# EAGLE board ME433_proto_board (EAGLE 5.11)
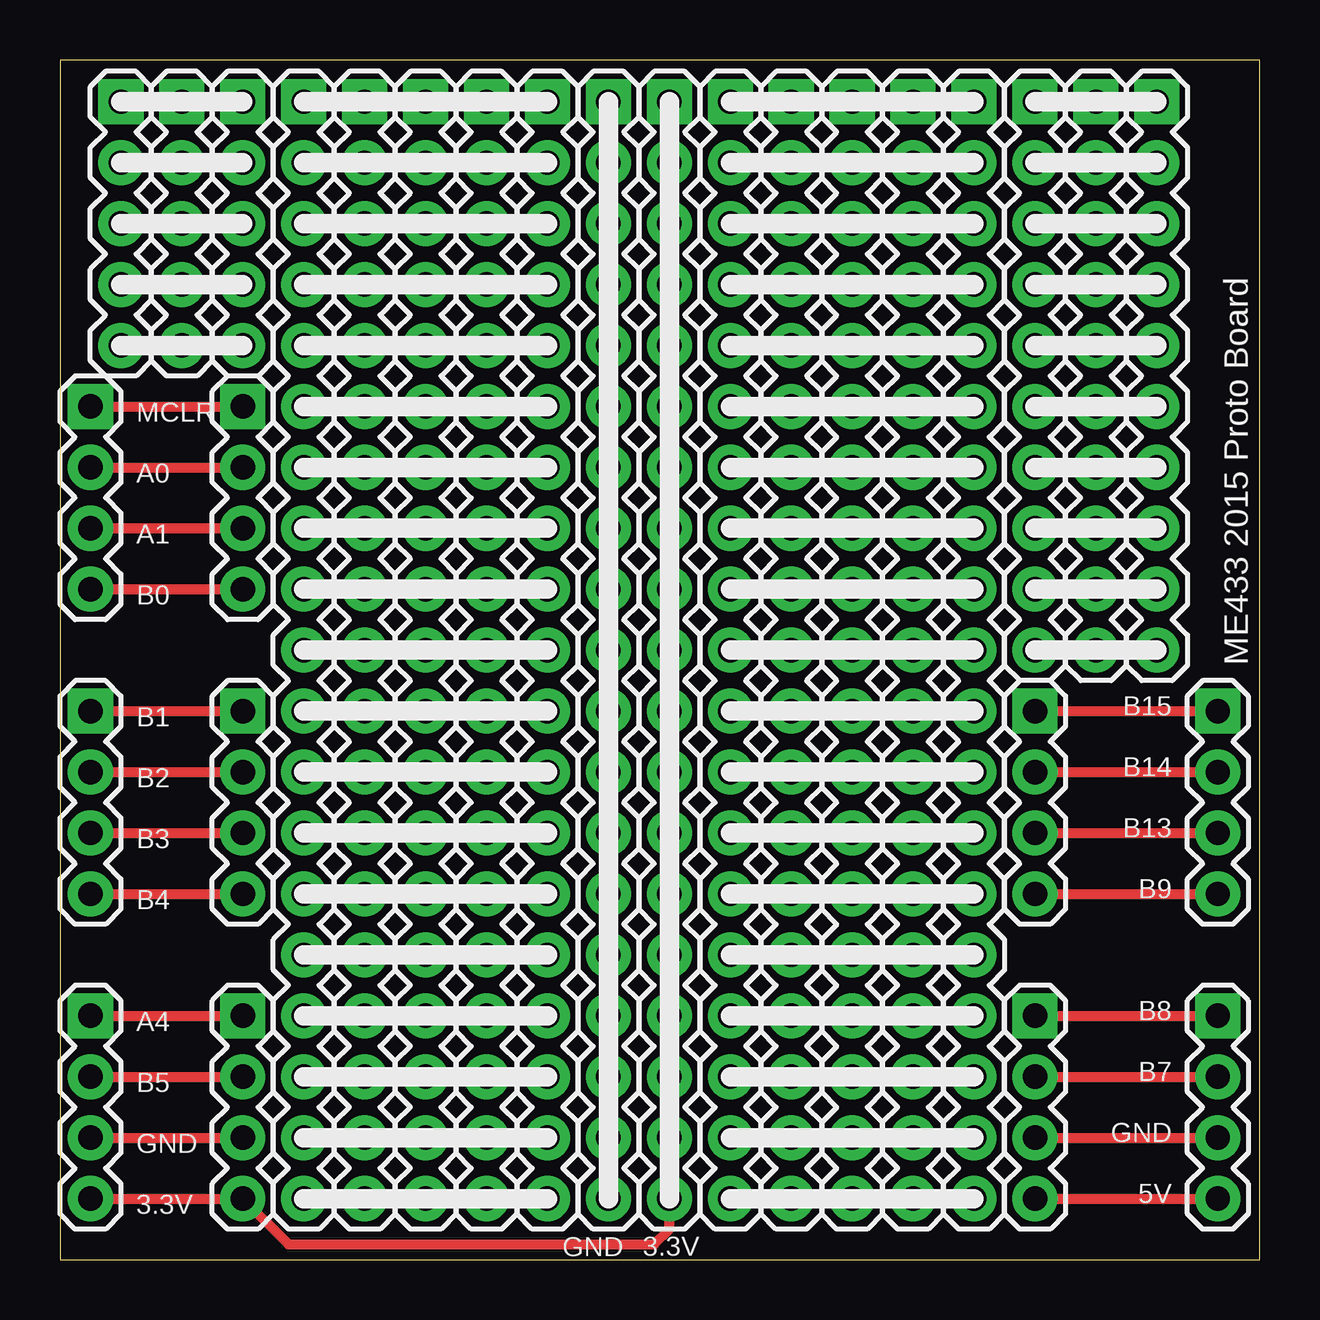
[diagram p0: board, top side]
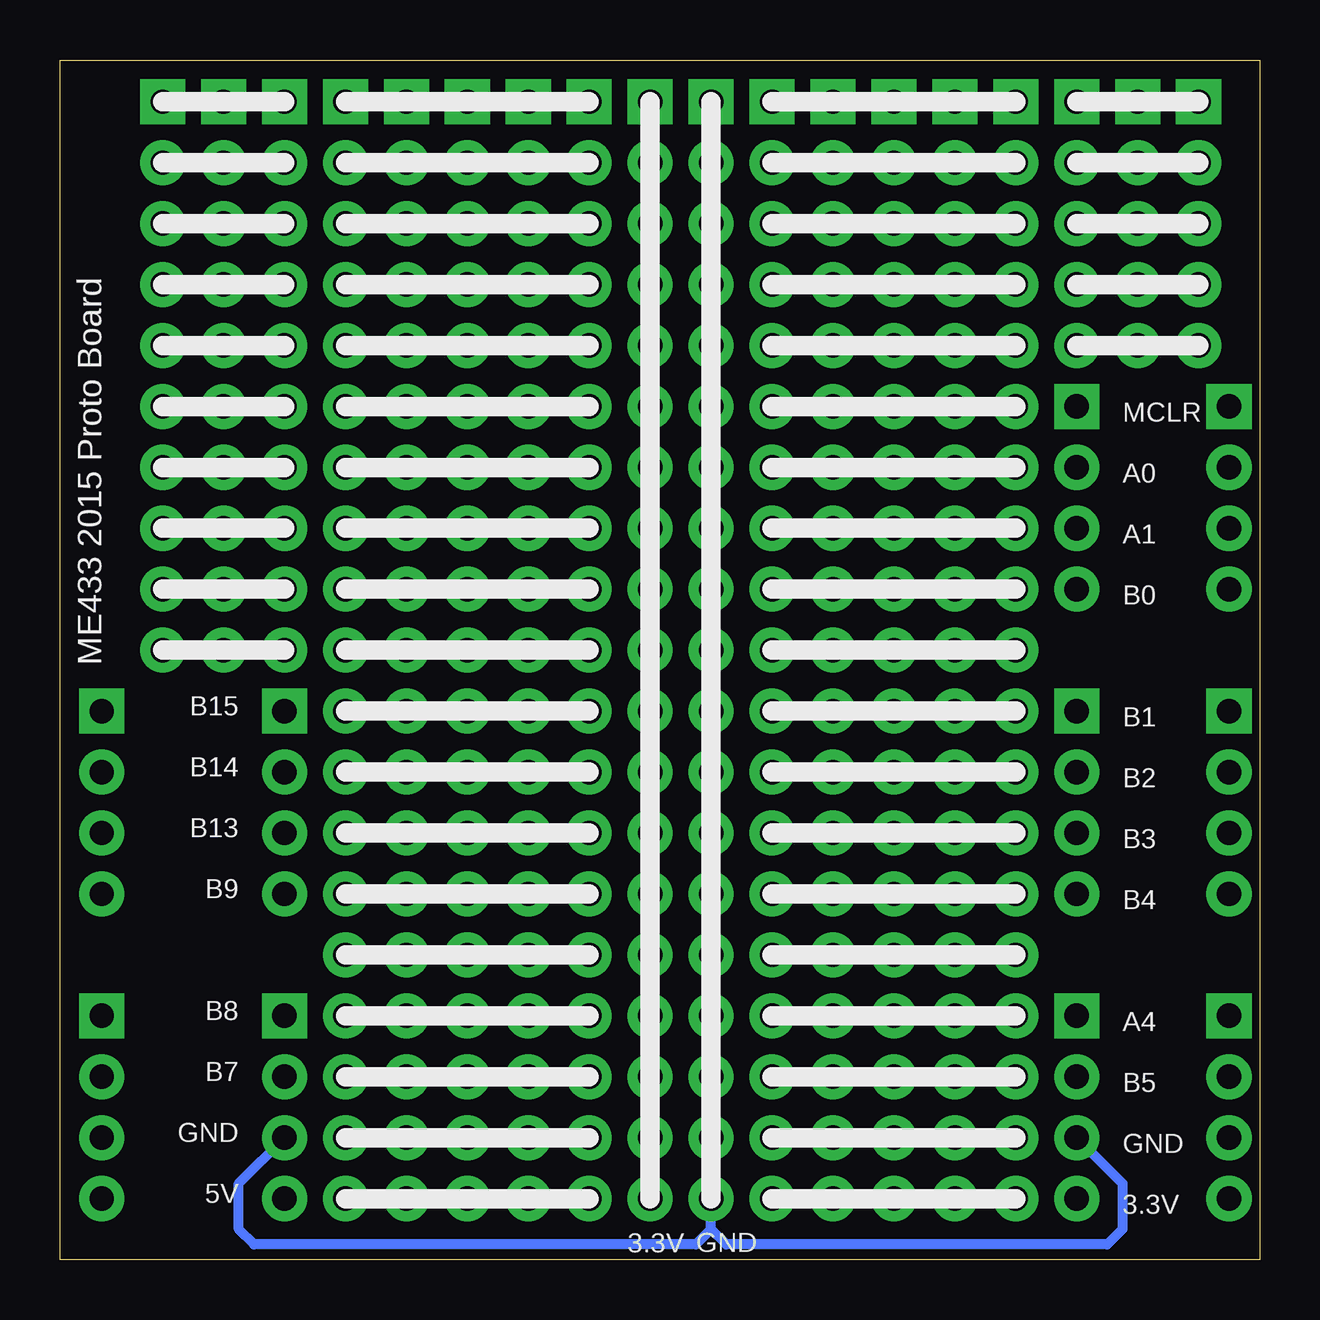
[diagram p1: board, bottom side, seen from below]

Size 50 x 50 mm. Coordinates in mm from the lower left corner, seen from the top.
Outline: 0,0 50,0 50,50 0,50 0,0
Copper layers (1*16): Top 0.035mm / dielectric 1.5mm / Bottom 0.035mm
Design rules "default": minimum track width 10mil, minimum drill 24mil, track to track 8mil, track to pad 8mil, pad to pad 8mil, via to via 8mil, smd to smd 8mil, copper to edge 40mil, drill to drill 8mil, minimum pad ring 10mil, minimum via ring 8mil, stop-mask expansion 4mil, vias tented up to drill 0mil, thermal gap 10mil

## Footprints (pad centres in the part's own frame; a part is rotated, then mirrored left to right if it is on the bottom)
1X04 = drill 1.016 pad 1.88 square: 1 0,0 | drill 1.016 pad 1.88 round: 2 2.54,0; 3 5.08,0; 4 7.62,0
1X19 = drill 1.016 pad 1.88 square: 1 0,0 | drill 1.016 pad 1.88 round: 2 2.54,0; 3 5.08,0; 4 7.62,0; 5 10.16,0; 6 12.7,0; 7 15.24,0; 8 17.78,0; 9 20.32,0; 10 22.86,0; 11 25.4,0; 12 27.94,0; 13 30.48,0; 14 33.02,0; 15 35.56,0; 16 38.1,0; 17 40.64,0; 18 43.18,0; 19 45.72,0
1X10 = drill 1.016 pad 1.88 square: 1 0,0 | drill 1.016 pad 1.88 round: 2 2.54,0; 3 5.08,0; 4 7.62,0; 5 10.16,0; 6 12.7,0; 7 15.24,0; 8 17.78,0; 9 20.32,0; 10 22.86,0
1X05 = drill 1.016 pad 1.88 square: 1 0,0 | drill 1.016 pad 1.88 round: 2 2.54,0; 3 5.08,0; 4 7.62,0; 5 10.16,0

## Placement (x,y rotation side)
U$1  1X04_HEADER  [1X04]  1.27,35.56 270 top
U$2  1X04_HEADER  [1X04]  1.27,22.86 270 top
U$3  1X04_HEADER  [1X04]  48.26,22.86 270 top
U$4  1X04_HEADER  [1X04]  48.26,10.16 270 top
U$5  1X04_HEADER  [1X04]  1.27,10.16 270 top
U$6  1X19_HEADER  [1X19]  10.16,48.26 270 top
U$7  1X19_HEADER  [1X19]  12.7,48.26 270 top
U$8  1X19_HEADER  [1X19]  15.24,48.26 270 top
U$9  1X19_HEADER  [1X19]  17.78,48.26 270 top
U$10  1X19_HEADER  [1X19]  20.32,48.26 270 top
U$11  1X19_HEADER  [1X19]  27.94,48.26 270 top
U$12  1X19_HEADER  [1X19]  30.48,48.26 270 top
U$13  1X19_HEADER  [1X19]  33.02,48.26 270 top
U$14  1X19_HEADER  [1X19]  38.1,48.26 270 top
U$15  1X19_HEADER  [1X19]  35.56,48.26 270 top
U$16  1X19_HEADER  [1X19]  22.86,48.26 270 top
U$17  1X19_HEADER  [1X19]  25.4,48.26 270 top
U$18  1X04_HEADER  [1X04]  7.62,35.56 270 top
U$19  1X04_HEADER  [1X04]  7.62,22.86 270 top
U$20  1X04_HEADER  [1X04]  7.62,10.16 270 top
U$21  1X04_HEADER  [1X04]  40.64,22.86 270 top
U$22  1X04_HEADER  [1X04]  40.64,10.16 270 top
U$23  1X10_HEADER  [1X10]  40.64,48.26 270 top
U$24  1X10_HEADER  [1X10]  43.18,48.26 270 top
U$25  1X10_HEADER  [1X10]  45.72,48.26 270 top
U$26  1X05_HEADER  [1X05]  7.62,48.26 270 top
U$27  1X05_HEADER  [1X05]  5.08,48.26 270 top
U$28  1X05_HEADER  [1X05]  2.54,48.26 270 top

## Library data of the parts
U$1-U$28 = ME433

## Nets
3.3V: U$5.4 U$17.1 U$17.2 U$17.3 U$17.4 U$17.5 U$17.6 U$17.7 U$17.8 U$17.9 U$17.10 U$17.11 U$17.12 U$17.13 U$17.14 U$17.15 U$17.16 U$17.17 U$17.18 U$17.19 U$20.4
5V: U$4.4 U$22.4
A0: U$1.2 U$18.2
A1: U$1.3 U$18.3
A4: U$5.1 U$20.1
B0: U$1.4 U$18.4
B1: U$2.1 U$19.1
B2: U$2.2 U$19.2
B3: U$2.3 U$19.3
B4: U$2.4 U$19.4
B5: U$5.2 U$20.2
B7: U$4.2 U$22.2
B8: U$4.1 U$22.1
B9: U$3.4 U$21.4
B13: U$3.3 U$21.3
B14: U$3.2 U$21.2
B15: U$3.1 U$21.1
GND: U$4.3 U$5.3 U$16.1 U$16.2 U$16.3 U$16.4 U$16.5 U$16.6 U$16.7 U$16.8 U$16.9 U$16.10 U$16.11 U$16.12 U$16.13 U$16.14 U$16.15 U$16.16 U$16.17 U$16.18 U$16.19 U$20.3 U$22.3
MCLR: U$1.1 U$18.1
N$1: U$6.1 U$7.1 U$8.1 U$9.1 U$10.1
N$2: U$6.2 U$7.2 U$8.2 U$9.2 U$10.2
N$3: U$6.3 U$7.3 U$8.3 U$9.3 U$10.3
N$4: U$6.4 U$7.4 U$8.4 U$9.4 U$10.4
N$5: U$6.5 U$7.5 U$8.5 U$9.5 U$10.5
N$6: U$6.6 U$7.6 U$8.6 U$9.6 U$10.6
N$7: U$6.7 U$7.7 U$8.7 U$9.7 U$10.7
N$8: U$6.8 U$7.8 U$8.8 U$9.8 U$10.8
N$9: U$6.9 U$7.9 U$8.9 U$9.9 U$10.9
N$10: U$6.10 U$7.10 U$8.10 U$9.10 U$10.10
N$11: U$6.11 U$7.11 U$8.11 U$9.11 U$10.11
N$12: U$6.12 U$7.12 U$8.12 U$9.12 U$10.12
N$13: U$6.13 U$7.13 U$8.13 U$9.13 U$10.13
N$14: U$6.14 U$7.14 U$8.14 U$9.14 U$10.14
N$15: U$6.15 U$7.15 U$8.15 U$9.15 U$10.15
N$16: U$6.16 U$7.16 U$8.16 U$9.16 U$10.16
N$17: U$6.17 U$7.17 U$8.17 U$9.17 U$10.17
N$18: U$6.18 U$7.18 U$8.18 U$9.18 U$10.18
N$19: U$6.19 U$7.19 U$8.19 U$9.19 U$10.19
N$20: U$11.1 U$12.1 U$13.1 U$14.1 U$15.1
N$21: U$11.2 U$12.2 U$13.2 U$14.2 U$15.2
N$22: U$11.3 U$12.3 U$13.3 U$14.3 U$15.3
N$23: U$11.4 U$12.4 U$13.4 U$14.4 U$15.4
N$24: U$11.5 U$12.5 U$13.5 U$14.5 U$15.5
N$25: U$11.6 U$12.6 U$13.6 U$14.6 U$15.6
N$26: U$11.7 U$12.7 U$13.7 U$14.7 U$15.7
N$27: U$11.8 U$12.8 U$13.8 U$14.8 U$15.8
N$28: U$11.9 U$12.9 U$13.9 U$14.9 U$15.9
N$29: U$11.10 U$12.10 U$13.10 U$14.10 U$15.10
N$30: U$11.11 U$12.11 U$13.11 U$14.11 U$15.11
N$31: U$11.12 U$12.12 U$13.12 U$14.12 U$15.12
N$32: U$11.13 U$12.13 U$13.13 U$14.13 U$15.13
N$33: U$11.14 U$12.14 U$13.14 U$14.14 U$15.14
N$34: U$11.15 U$12.15 U$13.15 U$14.15 U$15.15
N$35: U$11.16 U$12.16 U$13.16 U$14.16 U$15.16
N$36: U$11.17 U$12.17 U$13.17 U$14.17 U$15.17
N$37: U$11.18 U$12.18 U$13.18 U$14.18 U$15.18
N$38: U$11.19 U$12.19 U$13.19 U$14.19 U$15.19
N$41: U$23.1 U$24.1 U$25.1
N$42: U$23.2 U$24.2 U$25.2
N$43: U$23.3 U$24.3 U$25.3
N$44: U$23.4 U$24.4 U$25.4
N$45: U$23.5 U$24.5 U$25.5
N$46: U$23.6 U$24.6 U$25.6
N$47: U$23.7 U$24.7 U$25.7
N$48: U$23.8 U$24.8 U$25.8
N$49: U$23.9 U$24.9 U$25.9
N$50: U$23.10 U$24.10 U$25.10
N$51: U$26.1 U$27.1 U$28.1
N$52: U$26.2 U$27.2 U$28.2
N$53: U$26.3 U$27.3 U$28.3
N$54: U$26.4 U$27.4 U$28.4
N$55: U$26.5 U$27.5 U$28.5

## Tracks (layer width: path | path; a pad name or v marks a point on that pad's centre or on a via)
3.3V
  Top 0.406: U$5.4 U$20.4 9.53,0.64 24.77,0.64 25.4,1.27 U$17.19 U$17.18 U$17.17 U$17.16 U$17.15 U$17.14 U$17.13 U$17.12 U$17.11 U$17.10 U$17.9 U$17.8 U$17.7 U$17.6 U$17.5 U$17.4 U$17.3 U$17.2 U$17.1
5V
  Top 0.406: U$22.4 U$4.4
A0
  Top 0.406: U$1.2 U$18.2
A1
  Top 0.406: U$1.3 U$18.3
A4
  Top 0.406: U$5.1 U$20.1
B0
  Top 0.406: U$1.4 U$18.4
B1
  Top 0.406: U$2.1 U$19.1
B2
  Top 0.406: U$2.2 U$19.2
B3
  Top 0.406: U$2.3 U$19.3
B4
  Top 0.406: U$2.4 U$19.4
B5
  Top 0.406: U$5.2 U$20.2
B7
  Top 0.406: U$22.2 U$4.2
B8
  Top 0.406: U$22.1 U$4.1
B9
  Top 0.406: U$21.4 U$3.4
B13
  Top 0.406: U$21.3 U$3.3
B14
  Top 0.406: U$21.2 U$3.2
B15
  Top 0.406: U$21.1 U$3.1
GND
  Top 0.406: U$5.3 U$20.3 | U$22.3 U$4.3 | U$16.19 U$16.18 U$16.17 U$16.16 U$16.15 U$16.14 U$16.13 U$16.12 U$16.11 U$16.10 U$16.9 U$16.8 U$16.7 U$16.6 U$16.5 U$16.4 U$16.3 U$16.2 U$16.1
  Bottom 0.406: U$20.3 5.71,3.17 5.71,1.27 6.35,0.64 22.23,0.64 22.86,1.27 | 22.86,1.27 U$16.19 | U$22.3 42.55,3.17 42.55,1.27 41.91,0.64 23.5,0.64 22.86,1.27
MCLR
  Top 0.406: U$1.1 U$18.1
N$1
  Top 0.406: U$6.1 U$7.1 U$8.1 U$9.1 U$10.1
N$2
  Top 0.406: U$6.2 U$7.2 U$8.2 U$9.2 U$10.2
N$3
  Top 0.406: U$10.3 U$9.3 U$8.3 U$7.3 U$6.3
N$4
  Top 0.406: U$6.4 U$7.4 U$8.4 U$9.4 U$10.4
N$5
  Top 0.406: U$10.5 U$9.5 U$8.5 U$7.5 U$6.5
N$6
  Top 0.406: U$6.6 U$7.6 U$8.6 U$9.6 U$10.6
N$7
  Top 0.406: U$10.7 U$9.7 U$8.7 U$7.7 U$6.7
N$8
  Top 0.406: U$6.8 U$7.8 U$8.8 U$9.8 U$10.8
N$9
  Top 0.406: U$10.9 U$9.9 U$8.9 U$7.9 U$6.9
N$10
  Top 0.406: U$6.10 U$7.10 U$8.10 U$9.10 U$10.10
N$11
  Top 0.406: U$10.11 U$9.11 U$8.11 U$7.11 U$6.11
N$12
  Top 0.406: U$6.12 U$7.12 U$8.12 U$9.12 U$10.12
N$13
  Top 0.406: U$10.13 U$9.13 U$8.13 U$7.13 U$6.13
N$14
  Top 0.406: U$6.14 U$7.14 U$8.14 U$9.14 U$10.14
N$15
  Top 0.406: U$10.15 U$9.15 U$8.15 U$7.15 U$6.15
N$16
  Top 0.406: U$6.16 U$7.16 U$8.16 U$9.16 U$10.16
N$17
  Top 0.406: U$10.17 U$9.17 U$8.17 U$7.17 U$6.17
N$18
  Top 0.406: U$6.18 U$7.18 U$8.18 U$9.18 U$10.18
N$19
  Top 0.406: U$10.19 U$9.19 U$8.19 U$7.19 U$6.19
N$20
  Top 0.406: U$11.1 U$12.1 U$13.1 U$15.1 U$14.1
N$21
  Top 0.406: U$14.2 U$15.2 U$13.2 U$12.2 U$11.2
N$22
  Top 0.406: U$11.3 U$12.3 U$13.3 U$15.3 U$14.3
N$23
  Top 0.406: U$14.4 U$15.4 U$13.4 U$12.4 U$11.4
N$24
  Top 0.406: U$11.5 U$12.5 U$13.5 U$15.5 U$14.5
N$25
  Top 0.406: U$14.6 U$15.6 U$13.6 U$12.6 U$11.6
N$26
  Top 0.406: U$11.7 U$12.7 U$13.7 U$15.7 U$14.7
N$27
  Top 0.406: U$14.8 U$15.8 U$13.8 U$12.8 U$11.8
N$28
  Top 0.406: U$11.9 U$12.9 U$13.9 U$15.9 U$14.9
N$29
  Top 0.406: U$14.10 U$15.10 U$13.10 U$12.10 U$11.10
N$30
  Top 0.406: U$11.11 U$12.11 U$13.11 U$15.11 U$14.11
N$31
  Top 0.406: U$14.12 U$15.12 U$13.12 U$12.12 U$11.12
N$32
  Top 0.406: U$11.13 U$12.13 U$13.13 U$15.13 U$14.13
N$33
  Top 0.406: U$14.14 U$15.14 U$13.14 U$12.14 U$11.14
N$34
  Top 0.406: U$11.15 U$12.15 U$13.15 U$15.15 U$14.15
N$35
  Top 0.406: U$14.16 U$15.16 U$13.16 U$12.16 U$11.16
N$36
  Top 0.406: U$11.17 U$12.17 U$13.17 U$15.17 U$14.17
N$37
  Top 0.406: U$14.18 U$15.18 U$13.18 U$12.18 U$11.18
N$38
  Top 0.406: U$11.19 U$12.19 U$13.19 U$15.19 U$14.19
N$41
  Top 0.406: U$25.1 U$24.1 U$23.1
N$42
  Top 0.406: U$23.2 U$24.2 U$25.2
N$43
  Top 0.406: U$25.3 U$24.3 U$23.3
N$44
  Top 0.406: U$23.4 U$24.4 U$25.4
N$45
  Top 0.406: U$25.5 U$24.5 U$23.5
N$46
  Top 0.406: U$23.6 U$24.6 U$25.6
N$47
  Top 0.406: U$23.7 U$24.7 U$25.7
N$48
  Top 0.406: U$23.8 U$24.8 U$25.8
N$49
  Top 0.406: U$23.9 U$24.9 U$25.9
N$50
  Top 0.406: U$23.10 U$24.10 U$25.10
N$51
  Top 0.406: U$28.1 U$27.1 U$26.1
N$52
  Top 0.406: U$28.2 U$27.2 U$26.2
N$53
  Top 0.406: U$28.3 U$27.3 U$26.3
N$54
  Top 0.406: U$26.4 U$27.4 U$28.4
N$55
  Top 0.406: U$28.5 U$27.5 U$26.5

## Text on the board
tPlace: MCLR | A0 | A1 | B0 | ME433 2015 Proto Board | B15 | B1 | B14 | B2 | B13 | B3 | B9 | B4 | B8 | A4 | B7 | B5 | GND | GND | 5V | 3.3V | GND | 3.3V
bPlace: MCLR | A0 | A1 | B0 | ME433 2015 Proto Board | B15 | B1 | B14 | B2 | B13 | B3 | B9 | B4 | B8 | A4 | B7 | B5 | GND | GND | 5V | 3.3V | 3.3V | GND